# Altium PCB PSoC6-Cardiac-PCB.PcbDoc (part 2 of 2)
Units mil, origin at the board's own origin, x right, y up, seen from the top; angles counter-clockwise.
Board outline 1456 x 1820 mil, 4 copper layers (Top Layer, Layer 1, Layer 2, Bottom Layer), stack 41.656 mil thick; 58 components, 40 nets, 282 pads, 88 vias.
Unrouted connection lines stored in the file: 6.
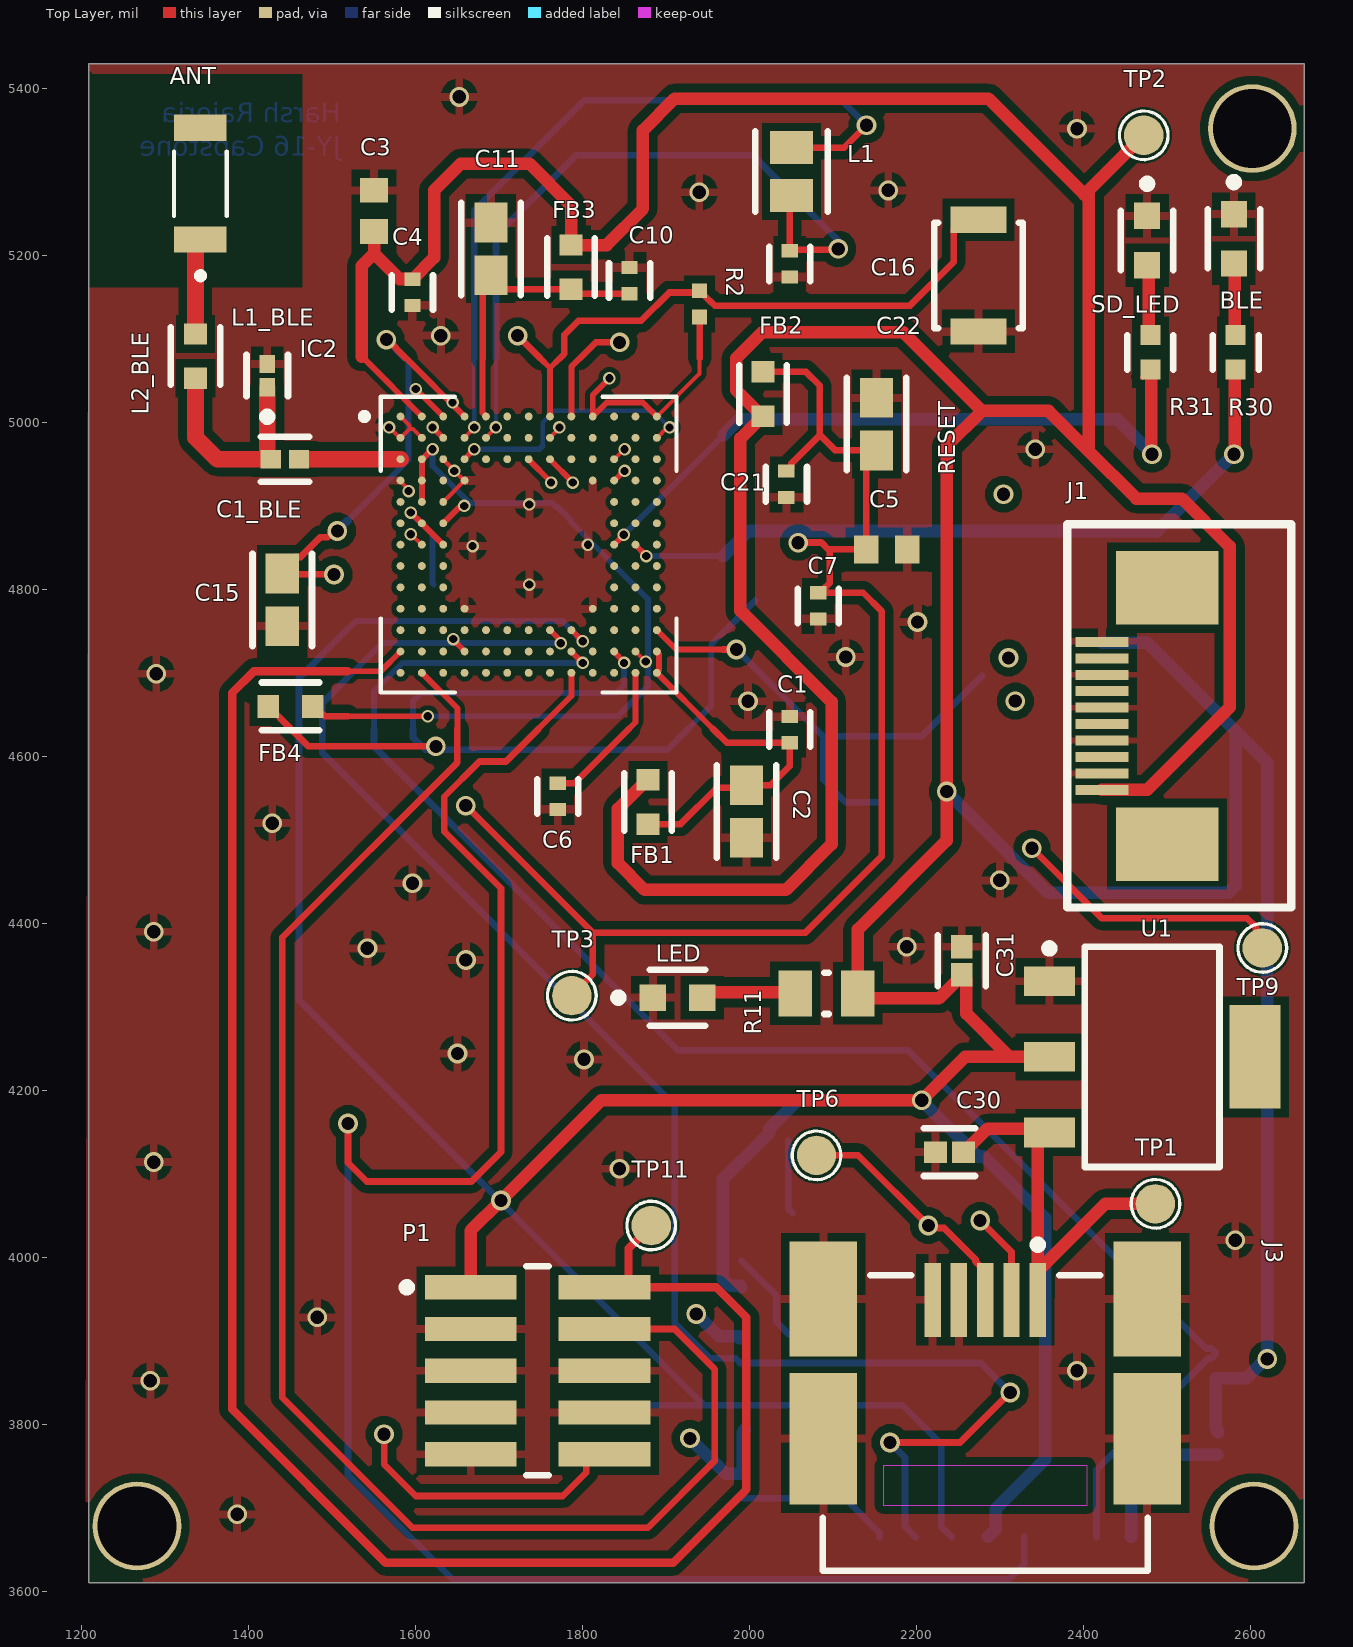
[diagram p0: Top Layer view]

## Polygon pours and split planes (outlines as drawn)
GND on Bottom Layer "GND_Bottom" (solid, pour order 1): 1208,3610 2664,3610 2664,5430 1208,5430
GND on Layer 1 "GND_L01" (solid, pour order 0): 1208,5430 2664,5430 2664,3616 1208,3616
GND on Layer 2 "GND_L01" (solid, pour order 3): 1207.96,5430 2668,5430 2668,3608 1206.06,3608
GND on Top Layer "GND_L01" (solid, pour order 2): 1207.92,5430 2664,5430 2664,3612 2662,3610 1204.12,3610

## Other copper
Top Layer:
  pour cut-out: 1208.4,5417.51 1464.31,5417.51 1464.31,5161.6 1208.4,5161.6
Bottom Layer:
  text "Harsh Rajoria / JY-16 Capstone" at 1510,5312 h40

## Silkscreen, mask and mechanical layers (free items; w line width, h text height)
Mechanical 1:
  the board outline again, w0

## Text inside footprints (layer, text, board x,y; h text height)
J2: Mechanical 1 "J1" at 2520,4667.07 h20 r90
J3: Mechanical 1 "PCB EDGE" at 1782.1,3649.02 h20